# Altium PCB 5V2A.PcbDoc
Units mm, origin at the board's own origin, x right, y up, seen from the top; angles counter-clockwise.
Board outline 20.25 x 25.25 mm, 2 copper layers (Top Layer, Bottom Layer), stack 1.78 mm thick; 15 components, 14 nets, 57 pads, 0 vias.
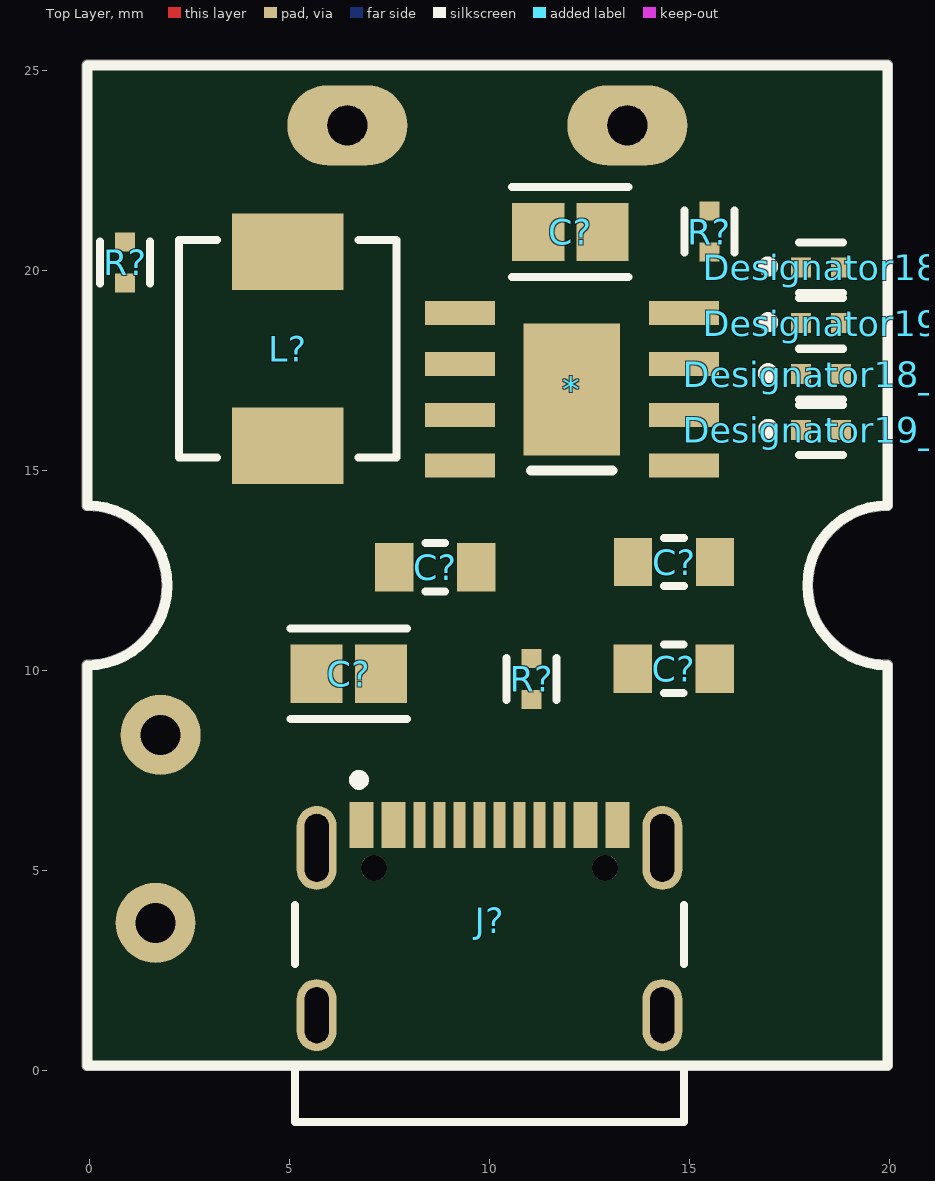
[diagram p0: Top Layer view]
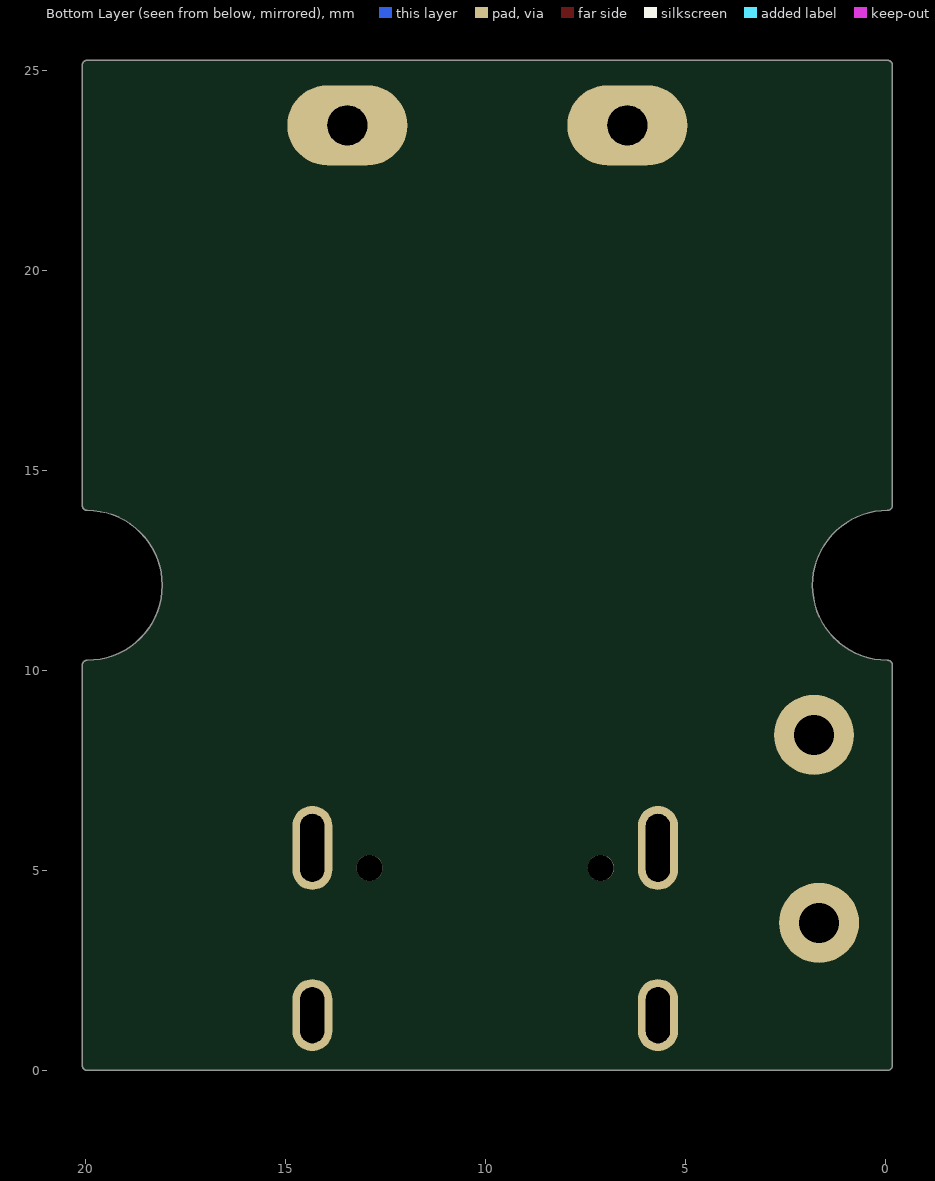
[diagram p1: Bottom Layer view, seen from below]

## Layer stack, top to bottom
Top Solder: solder mask 0.0102, Solder Resist, Dk 3.5
Top Layer: signal copper 0.0356
Dielectric 1: dielectric 1.7086, FR-4, Dk 4.8
Bottom Layer: signal copper 0.0356
Bottom Solder: solder mask 0.0102, Solder Resist, Dk 3.5

## Board outline
-0.182,0.119 ccw(c-0.055,0.119) -0.055,-0.008 19.945,-0.008 ccw(c19.945,0.119) 20.072,0.119 20.072,10.119 ccw(c19.945,10.119) 19.944,10.246 cw(c19.945,12.119) 19.945,13.992 ccw(c19.945,14.119) 20.072,14.119 20.072,25.119 ccw(c19.945,25.119) 19.945,25.246 -0.055,25.246 ccw(c-0.055,25.119) -0.182,25.119 -0.182,14.119 ccw(c-0.055,14.119) -0.055,13.992 cw(c-0.055,12.119) 1.818,12.119 cw(c-0.055,12.119) -0.054,10.246 ccw(c-0.055,10.119) -0.182,10.119

## Design rules (kind name [scope] priority, off if disabled: settings)
Clearance [All] p1: gap=0.254 ignorepadtopadclearanceinfootprint=FALSE except(0: Arc-Hole Track-Hole SMDPad-Hole THPad-Hole Via-Hole Fill-Hole Poly-Hole Region-Hole Text-Hole)
PolygonConnect [All] p1: connectstyle=Relief reliefconductorwidth=0.254 reliefentries=4 polygonreliefangle="90 Angle" airgapwidth=0.254
RoutingVias [All] p1: holewidth=0.711 width=1.27 viastyle="Through Hole" minholewidth=0.711 minwidth=1.27 maxholewidth=0.711 maxwidth=1.27
SolderMaskExpansion [All] p1: expansion=0.102 istentingtop=FALSE
Width [All] p1: maxlimit=0.254 minlimit=0.254 preferedwidth=0.254
30 further rules are at their usual default settings.

## Classes and differential pairs
component class "5V2A schemat": C? L? R?
component class pakiet_schemat: C?

## Components (designator, comment, footprint, x,y, rotation, side; value= is the part's Value field where it differs from the comment)
* "ip5306" ip5306 15.859,14.693 r90 top
C? "CGA3E2X7R1H104K080AA" FP-CGA3E-0_3-0_1-IPC_A 8.645,12.573 r0 top
C? "08051C104KAT2A" FP-0805-L_2_01_0_2-W_1_25-IPC_B 12.021,20.955 r0 top
C? "CGA3E2X7R1H104K080AA" FP-CGA3E-0_3-0_1-IPC_A 14.614,12.7 r0 top
C? "CGA3E2X7R1H104K080AA" FP-CGA3E-0_3-0_1-IPC_A 14.605,10.033 r0 top
C? "08051C104KAT2A" FP-0805-L_2_01_0_2-W_1_25-IPC_B 6.477,9.906 r0 top
Designator18 "Comment" FP-QBLP595-IB-MFG 18.288,20.066 r0 top
Designator18_1 "Comment" FP-QBLP595-IB-MFG 18.288,17.399 r0 top
Designator19 "Comment" FP-QBLP595-IB-MFG 18.293,18.674 r0 top
Designator19_1 "Comment" FP-QBLP595-IB-MFG 18.293,16.007 r0 top
J? "USB4105-GF-A" FP-USB4105-GF-A-MFG 10,2.54 r0 top
L? "IHLP2020CZER2R2M11" FP-IHLP-2020CZ-FP_1_905x2-MFG 4.953,18.034 r90 top
R? "ERJ-2RKF10R0X" FP-ERJ2RK-MFG 11.049,9.784 r90 top value=10Ω
R? "ERJ-2RKF10R0X" FP-ERJ2RK-MFG 0.889,20.193 r90 top value=10Ω
R? "ERJ-2RKF10R0X" FP-ERJ2RK-MFG 15.494,20.96 r90 top value=10Ω

## Footprints (in the part's own frame and the unit in brackets; to place one, negate y for a bottom-side part, rotate by r counter-clockwise, add the part's x,y. Pads: shape width x height; smd on the part's side, far side on the other; paste and mask are expansions set on the pad)
FP-0805-L_2_01_0_2-W_1_25-IPC_B [mm]
  rect 1.305x1.456 smd paste+0 mask+0: 1(-0.806,0) 2(0.806,0)
  silkscreen extent -1.46,-1.13 1.46,1.13, body extent -1.71,-0.98 1.71,0.98, height 0.25
FP-CGA3E-0_3-0_1-IPC_A [mm]
  rect 0.956x1.206 smd paste+0 mask+0: 1(-1.025,0) 2(1.025,0)
  silkscreen extent -0.25,-0.6 0.25,0.6, body extent -2,-1.1 2,1.1, height 0.25
FP-ERJ2RK-MFG [mm]
  rect 0.475x0.5 smd paste+0 mask+0: 1(-0.513,0) 2(0.513,0)
  silkscreen extent -0.53,-0.63 0.53,0.63, body extent -0.85,-0.38 0.85,0.38, height 0.25
FP-IHLP-2020CZ-FP_1_905x2-MFG [mm]
  rect 1.905x2.79 smd paste+0 mask+0: 1(-2.425,0) 2(2.425,0)
  silkscreen extent -2.72,-2.72 2.72,2.72, body extent -3.48,-2.82 3.48,2.82, height 0.25
FP-QBLP595-IB-MFG [mm]
  rect 0.5x0.5 smd paste+0 mask+0: 1(-0.5,0) 2(0.5,0)
  silkscreen extent -1.45,-0.63 0.55,0.63, body extent -0.85,-0.4 0.85,0.4, height 0.25
FP-USB4105-GF-A-MFG [mm]
  rrect100% 1x2.1 hole 1.7 slot 0.6 at 0 deg paste-1000 mask+0: 1(-4.32,3.015) 2(4.32,3.015)
  rrect100% 1x1.8 hole 1.4 slot 0.6 at 0 deg paste-1000 mask+0: 3(-4.32,-1.165) 4(4.32,-1.165)
  rect 0.6x1.15 smd paste+0 mask+0: A1-B12(-3.2,3.59) A4-B9(-2.4,3.59) B1-A12(3.2,3.59) B4-A9(2.4,3.59)
  rect 0.3x1.15 smd paste+0 mask+0: A5(-1.25,3.59) A6(-0.25,3.59) A7(0.25,3.59) A8(1.25,3.59) B5(1.75,3.59) B6(0.75,3.59) B7(-0.75,3.59) B8(-1.75,3.59)
  round 0.65 hole 0.65 unplated paste-1000 mask+0: ""(-2.89,2.515) ""(2.89,2.515)
  silkscreen extent -4.86,-3.84 4.86,4.84, body extent -4.96,-3.94 4.96,4.27, height 0.25
ip5306 [mm]
  rect 0.6x1.75 smd: 1(0.42,1) 2(1.69,1) 3(2.96,1) 4(4.23,1) 5(4.23,6.6) 6(2.96,6.6) 7(1.69,6.6) 8(0.42,6.6)
  rect 3.3x2.41 smd: EXP(2.325,3.8)
  silkscreen extent 0.29,2.78 0.29,4.82, body extent -0.15,0.85 4.77,6.84, height 1.49

## Part data
C? C? C?: library part CMP-2000-07546-2, "Cap Ceramic 100nF 50V X7R 10% Pad SMD 0603 +125°C Automotive T/R", Capacitance=100nF, Case Code (Imperial)=0603, Case Code (Metric)=1608, Dielectric=X7R, Max Operating Temperature=125°C, Min Operating Temperature=-55°C, Package Quantity=1, Ratings=AEC-Q200, Tolerance=10%, Voltage=50V, Case/Package=0603, Composition=Ceramic, Depth=0.8mm, Height=0.8mm, Lead Free="Lead Free", Length=1.6mm, Mount="Surface Mount", Packaging="Tape and Reel", Radiation Hardening=No, REACH SVHC="No SVHC", Termination=SMD/SMT, Thickness=0.035inch, Voltage Rating=50V, Voltage Rating (DC)=50V, Weight=7.1E-05oz, Width=0.8mm
C? C?: library part CMP-2007-04174-2, "General Purpose Ceramic Capacitor, 0805, 100nF, 10%, X7R, 15%, 100V", Capacitance=100nF, Case Code (Imperial)=0805, Case Code (Metric)=2012, Dielectric=X7R, Dielectric Material=Ceramic, Max Operating Temperature=125°C, Min Operating Temperature=-55°C, Package Quantity=2000, Tolerance=10%, Voltage=100V, Case/Package=0805, Construction=Flat, Contact Plating=Tin, Depth=1.25mm, Height=1.4mm, Lead Free="Lead Free", Length=2.01mm, Mount="Surface Mount", Number of Pins=2, Packaging="Tape and Reel", Radiation Hardening=No, REACH SVHC="No SVHC", RoHS Compliant=Yes, Series=-, Termination=SMD/SMT, Thickness=0.055inch, Voltage Rating=100V, Voltage Rating (DC)=100V, Width=0.049inch
J?: library part CMP-245163-000001-1, "CONN RCPT USB2.0 TYPEC 5A", Current Rating=5/6.25/1.25/0.25A, Manufacturer=GCT, Package=0, Temperature="-40°C to +85°C", Temperature Range High=+85°C, Temperature Range Low=-40°C, Voltage Rating=20V, Automotive=No, Category=Conn, ComponentLink2Description=Datasheet, ComponentLink2URL=https://gct.co/files/drawings/usb4105.pdf, Conn Orientation="Right Angle", Contact Material=Gold,Nickel, Device Class L1=Connectors, Device Class L2="USB Connectors", Device Class L3=unset, Digikey Description="CONN RCPT USB2.0 TYPEC 5A", Height=3.46mm, Is Female=yes, Lead Free=Yes, Manufacturer Part Number=USB4105-GF-A, Number Of Contacts=16, Octopart=https://octopart.com/usb4105-gf-a-gct-106627878, RoHS=TRUE, Usb Standard="USB 2.0"
L?: library part CMP-02424-000234-1, "Fixed Inductors Commercial Low DCR Series 2.2uH 6.75A 25mΩ 20%", Case/Package=2020, Current Rating=6.75A, DC Resistance (DCR)=25mR, Inductance=2.2uH, Inductance Tolerance=20%, Max DC Current=5.5A, Max Operating Temperature=125°C, Min Operating Temperature=-55°C, Package Quantity=2000, Self Resonant Frequency=41MHz, Test Frequency=100kHz, Contact Plating=Tin, Core Material=Metal, Depth=5.43mm, Height=3mm, Height - Seated (Max)=0.118inch, Lead Free="Lead Free", Length=5.74mm, Military Standard=Not, Mount="Surface Mount", Packaging="Tape and Reel", Radiation Hardening=No, RMS Current (Irms)=6.75A, Saturation Current=5.5A, Shielding=Shielded, Termination=SMD/SMT, Tolerance=20%, Width=0.204inch
R? R? R?: library part CMP-2002-00622-4, "RES SMD 10 OHM 1% 1/10W 0402", Manufacturer=Panasonic, Package=ERJ2RK, Power Rating=0.1W, Resistance=10Ω, Temperature="-55°C to +155°C", Temperature Coefficient=100ppm/°C, Temperature Range High=+155°C, Temperature Range Low=-55°C, Tolerance=1%, Voltage Rating=50V, Automotive=Yes, Automotive Grade="Grade 0", Category=Res, ComponentLink2Description=Datasheet, ComponentLink2URL=https://industrial.panasonic.com/cdbs/www-data/pdf/RDA0000/AOA0000C304.pdf, Composition="Thick Film", Device Class L1="Passive Components", Device Class L2=Resistors, Device Class L3="Chip SMD Resistors", Digikey Description="RES SMD 10 OHM 1% 1/10W 0402", Footprint Url=https://industrial.panasonic.com/cdbs/www-data/pdf/RDA0000/DMA0000COL17.pdf, Height=0.4mm, Lead Free=Yes, Manufacturer Part Number=ERJ-2RKF10R0X, Mouser Description="Thick Film Resistors - SMD 0402 10.0ohms 1% Tol AEC-Q200", Octopart=https://octopart.com/erj-2rkf10r0x-panasonic-55404982, RoHS=TRUE, Series=ERJ

## Free pads (board coordinates)
  oval 3x2 hole 1: 1(6.445,23.619) 2(13.445,23.619)
  round 2 hole 1: 5V+(1.778,8.382) 5V-(1.651,3.683)

## Nets (pads, with @x,y where several pads share a name; then routed paths per layer and width w, separated by ;. In a path a pad name is that pad's centre, name@x,y a point inside that pad or via, vN(x,y) a via of type N, cw(c..) or ccw(c..) an arc to the next point about the centre after c; other vN are vias at no path point)
3.7V: 
7.4V: 
11.1V: 
BAT+: 
BAT-: 
CH+: 
CH-: 
LCD+: 
LI+: 
LI-: 
Net_1: 
Net_2: 
OUT+: 
OUT-: 
pads on no net: *.1 *.2 *.3 *.4 *.5 *.6 *.7 *.8 *.EXP C?.1 C?.2 Designator18.1 Designator18.2 Designator18_1.1 Designator18_1.2 Designator19.1 Designator19.2 Designator19_1.1 Designator19_1.2 J?. J?.1 J?.2 J?.3 J?.4 J?.A1-B12 J?.A4-B9 J?.A5 J?.A6 J?.A7 J?.A8 J?.B1-A12 J?.B4-A9 J?.B5 J?.B6 J?.B7 J?.B8 L?.1 L?.2 R?.1 R?.2

## Silkscreen, mask and mechanical layers (free items; w line width, h text height)
Top Overlay:
  lines w0.254: 8.945,25.119 -0.055,25.119 ; -0.055,14.119 cw(c-0.055,12.119) -0.055,10.119 -0.055,0.119 19.945,0.119 19.945,10.119 cw(c19.945,12.119) 19.945,14.119 19.945,25.119 -0.055,25.119 ; -0.055,14.119 -0.055,25.119 ; -0.055,14.119 -0.055,25.119